# Altium PCB 官方修改版本-两层板.PcbDoc
Units mil, origin at the board's own origin, x right, y up, seen from the top; angles counter-clockwise.
Board outline 15922 x 10697 mil, 4 copper layers (Top Layer, MidLayer1, MidLayer2, Bottom Layer), stack 61.2 mil thick; 53 components, 64 nets, 140 pads, 49 vias.
Unrouted connection lines stored in the file: 5.
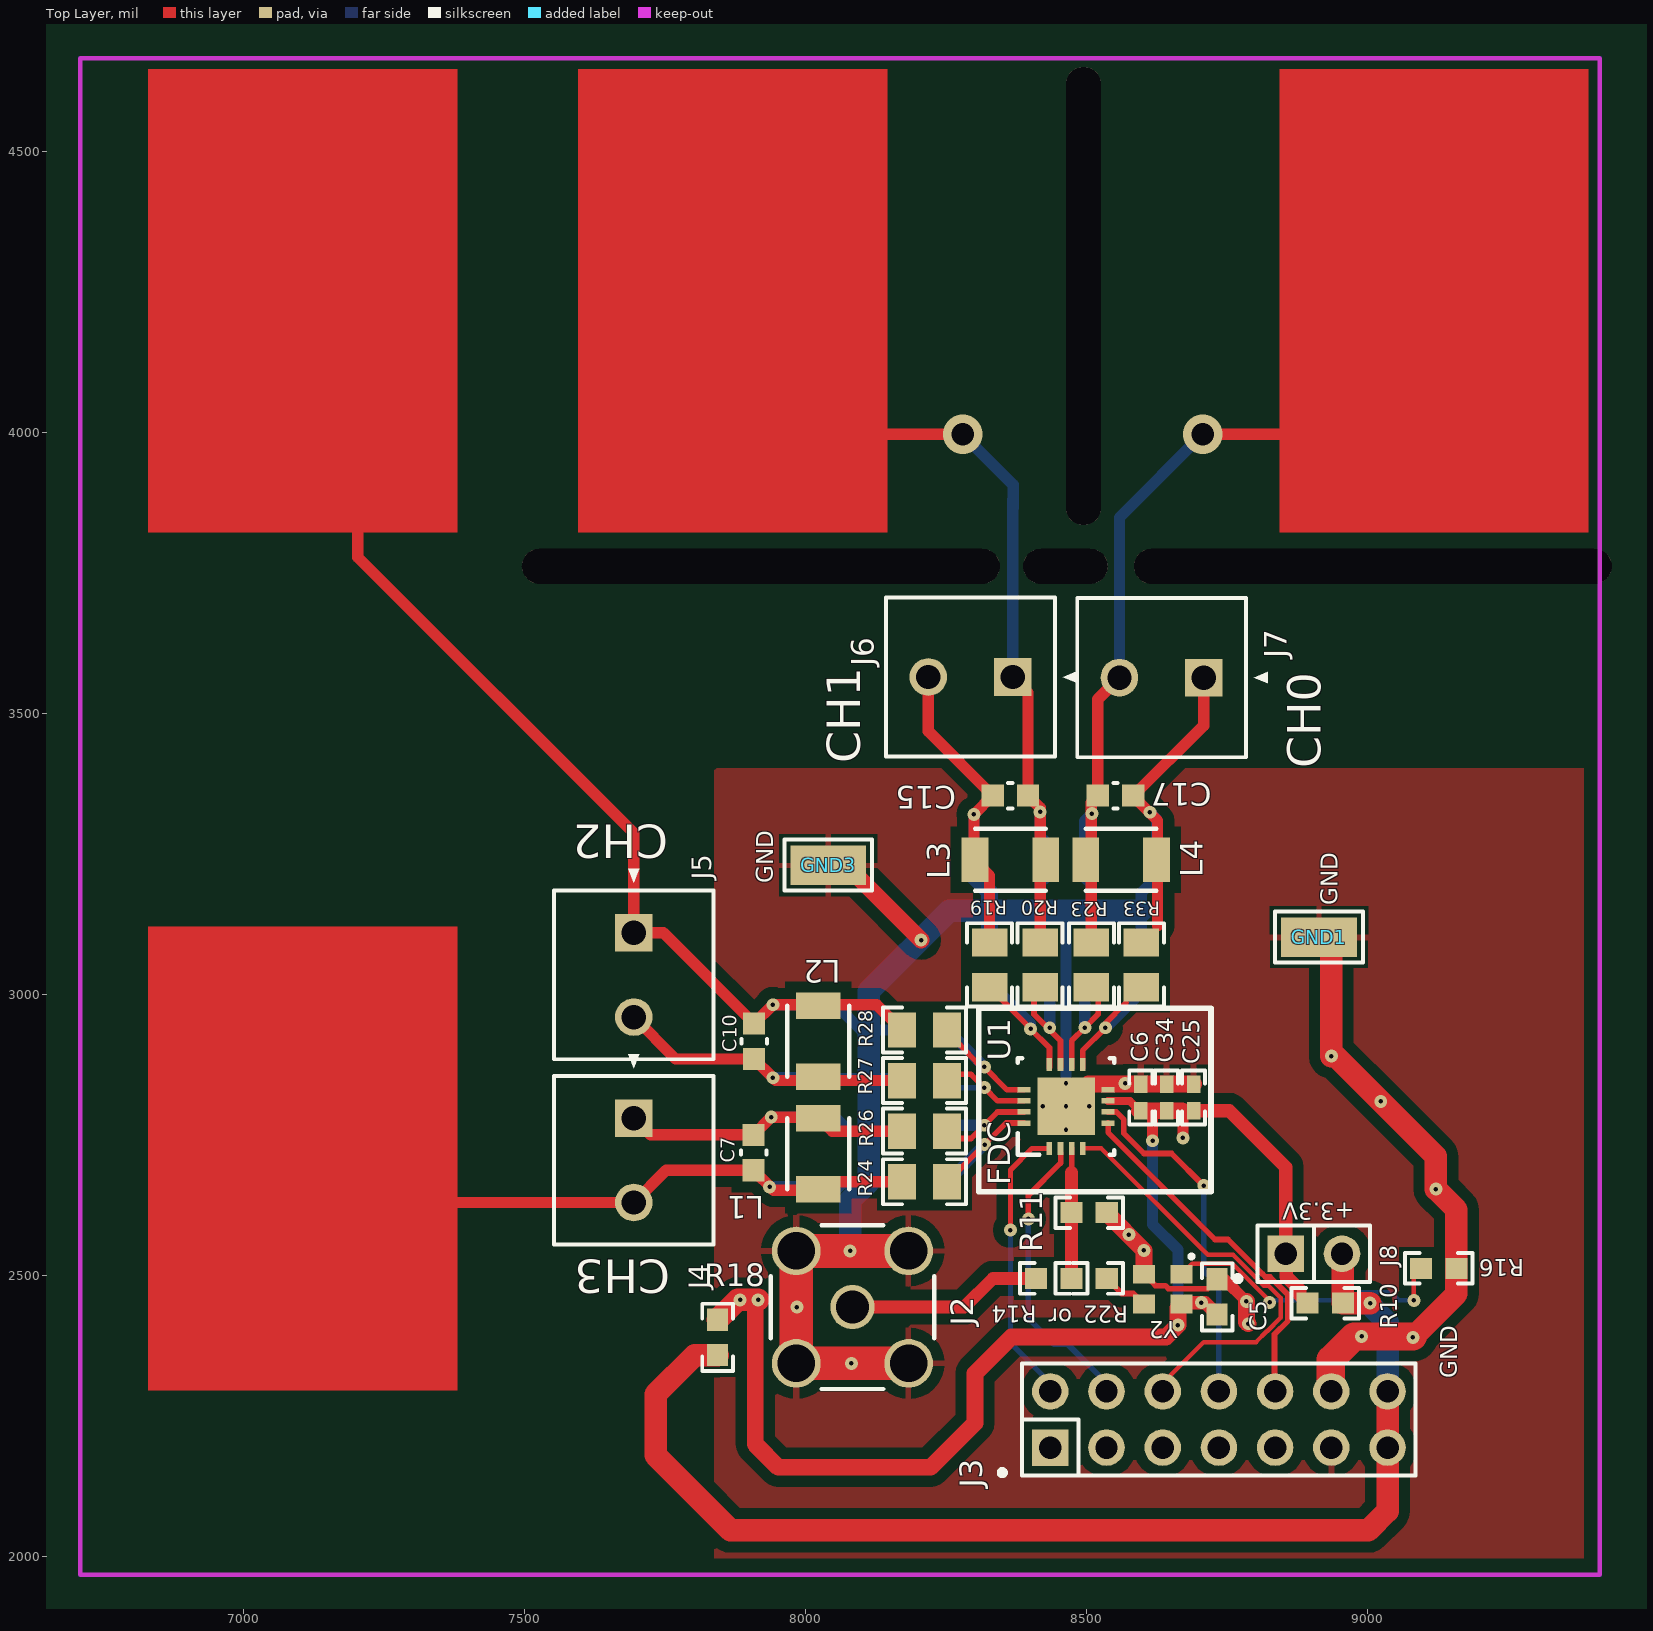
[diagram p0: Top Layer view]
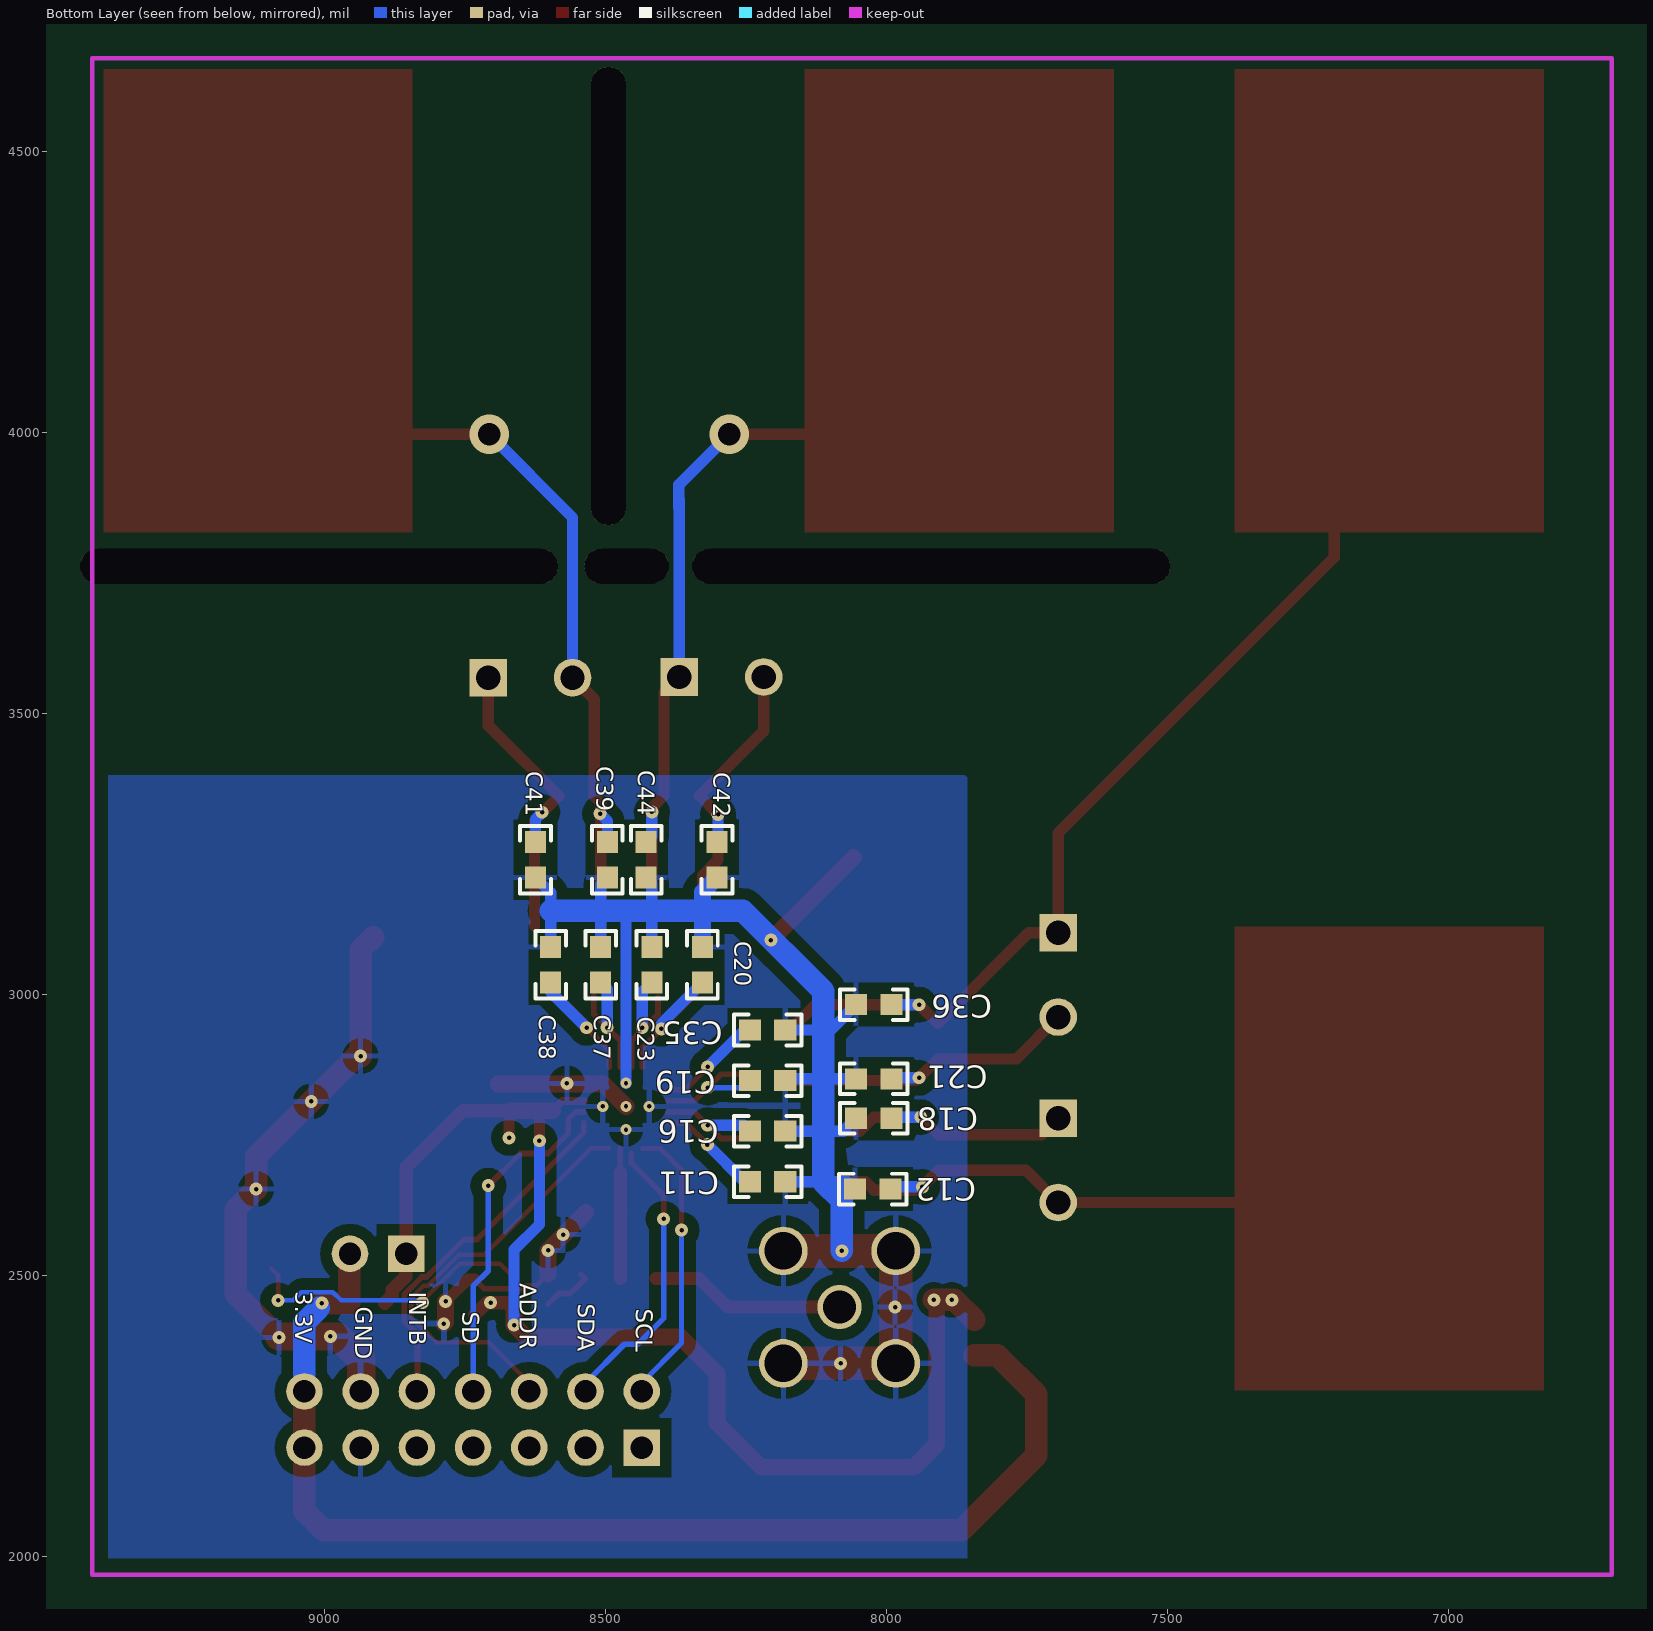
[diagram p1: Bottom Layer view, seen from below]
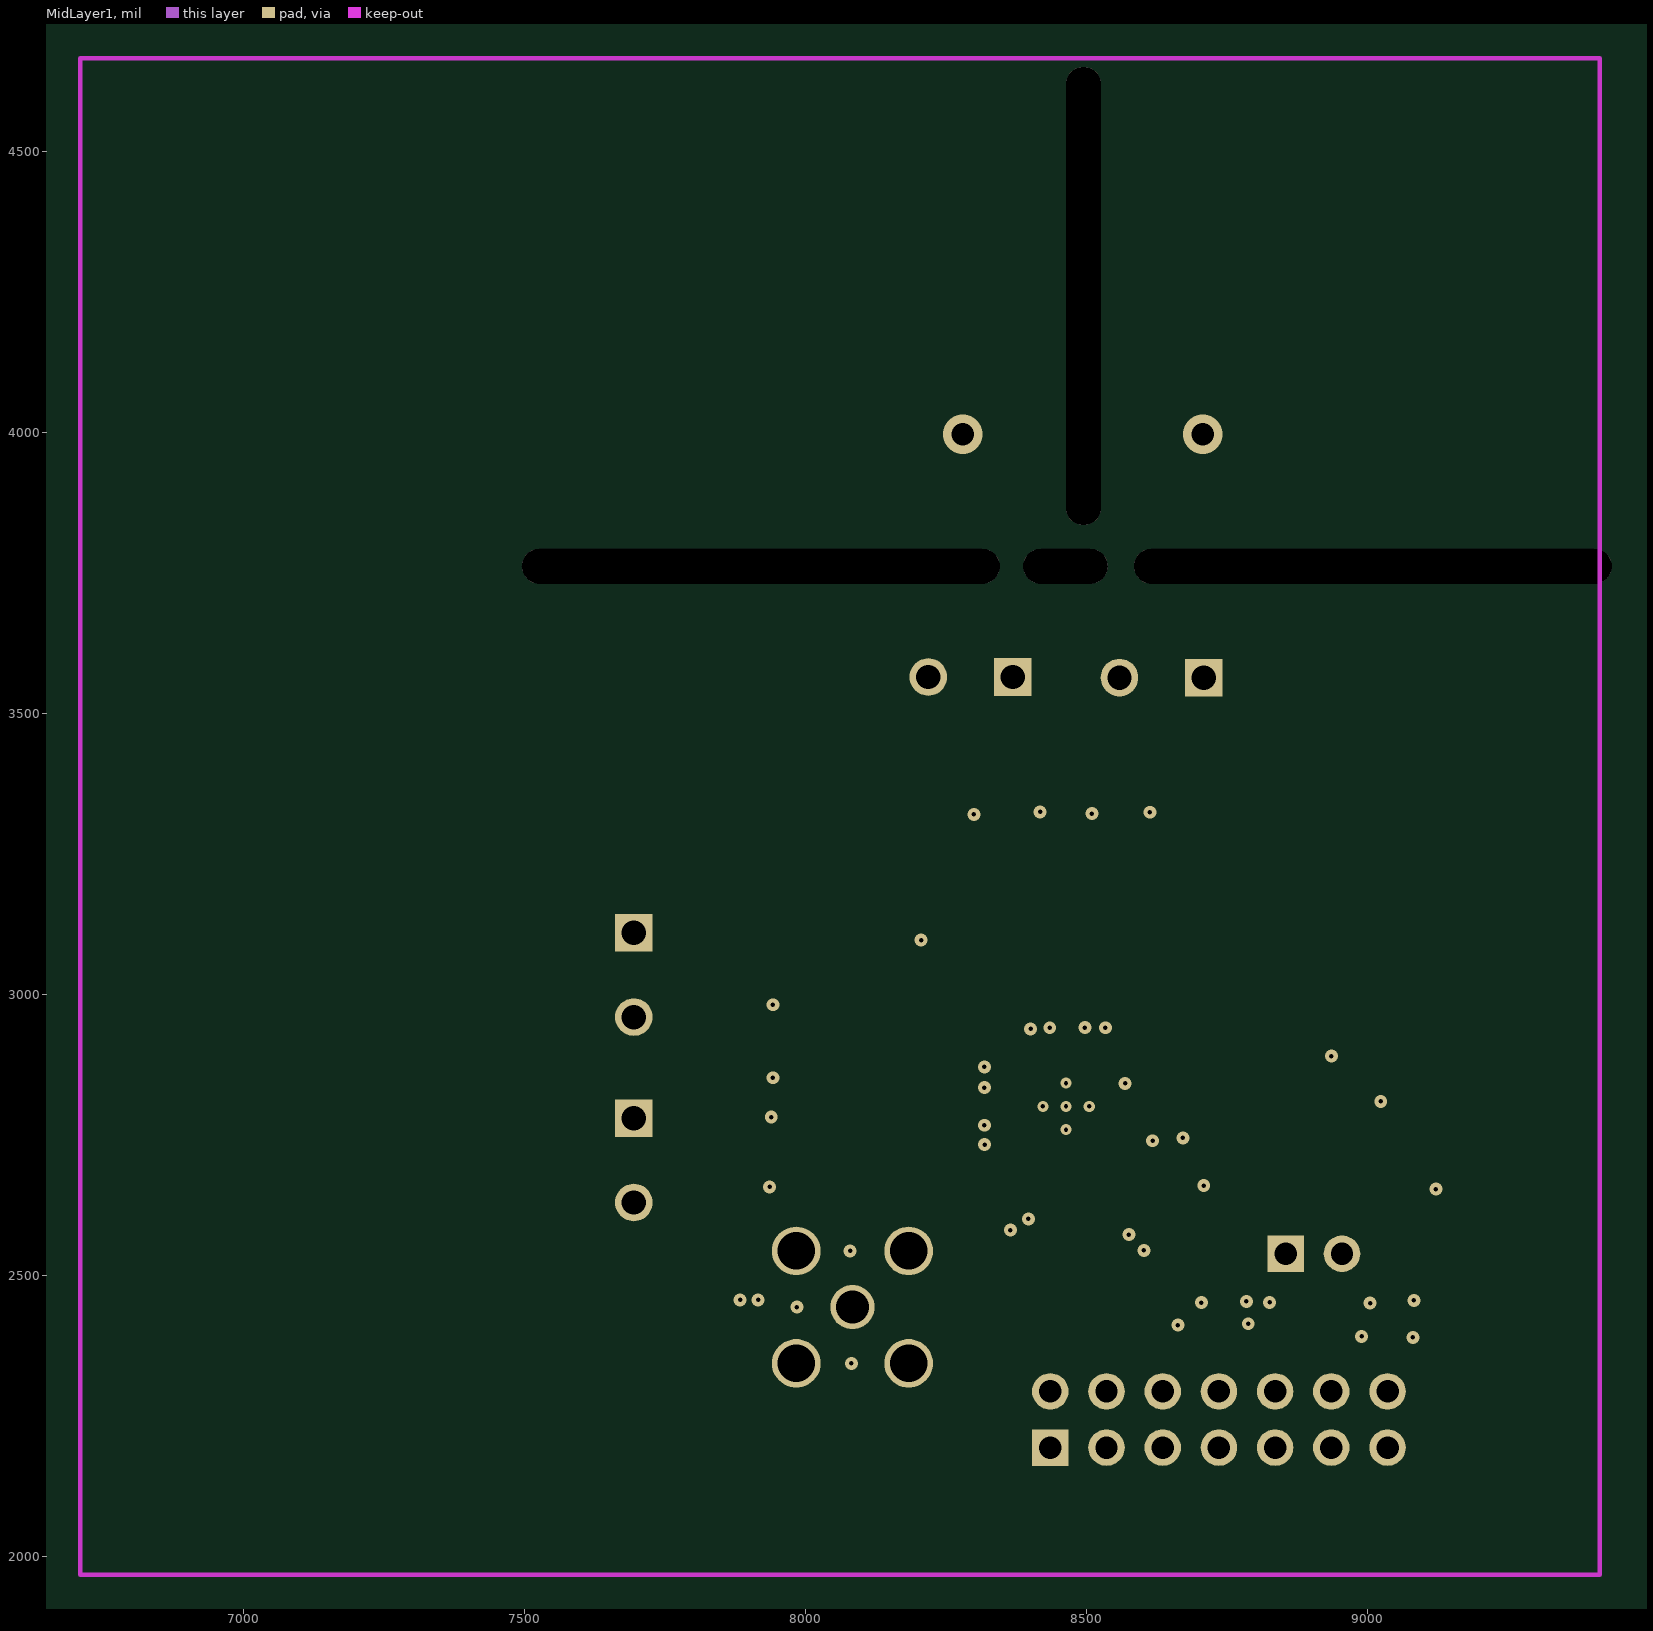
[diagram p2: MidLayer1]

## Layer stack, top to bottom
Top Layer: signal copper 1.4
Dielectric: core 12.6, FR-4, Dk 3.9
MidLayer1: signal copper 1.4
Dielectric: prepreg 30.4, FR-4, Dk 3.9
MidLayer2: signal copper 1.4
Dielectric: core 12.6, FR-4, Dk 4.8
Bottom Layer: signal copper 1.4

## Board outline
-537,9070 -444,9163 15323,9163 15323,-1084 14873,-1534 14671,-1332 -599,-1332 -599,-1394

## Design rules (kind name [scope] priority, off if disabled: settings)
AcuteAngle [All] p1: minimum=4.50000000000000E+0001 checktracksonly=FALSE
AssemblyTestPointUsage [All] p1: valid=2
Clearance Clearance_BoardEdge_MountingHoles [OnCopper and InComponentClass('Mounting Holes') vs IsKeepOut] p1: gap=40
Clearance Clearance_BoardEdge_Poly [OnCopper and InPoly vs IsKeepOut] p2: gap=25
Clearance Clearance_BoardEdge [OnCopper and Not InComponentClass('Logo') and not InComponentClass('FiducialMark') and not InRegion(1000,500,4000,800) and Not IsKeepout vs IsKeepOut] p3: gap=30
Clearance Clearance_Poly [InPolygon] p4: gap=20
Clearance [All] p5: gap=4
ComponentClearance ComponentClearance_Logo [InComponentClass('Logo')] p1: gap=50 collisioncheckmode=3 verticalgap=10 showdistances=FALSE
ComponentClearance ComponentClearance_ScrewToNut [(HasFootprint('NY PMS 440 0025 PH')) vs (HasFootprint('Keystone_1902C'))] p2: gap=5 collisioncheckmode=3 verticalgap=10 showdistances=FALSE
ComponentClearance ComponentClearance_MountingHoles [InComponentClass('Mounting Holes')] p3: gap=250 collisioncheckmode=3 verticalgap=100000 showdistances=FALSE
ComponentClearance ComponentClearance_SmallPassives [HasFootprint('0201*') or HasFootprint('0402*') or HasFootprint('0508') or HasFootprint('0603*') or HasFootprint('0612') or HasFootprint('0805*') or HasFootprint('0815*') or HasFootprint('0830*') or HasFootprint('1206*') or HasFootprint('1210*') or HasFootprint('1808*') or HasFootprint('1812*') or HasFootprint('1825*') or HasFootprint('2010*') or HasFootprint('2220*') or HasFootprint('2225*') or HasFootprint('2512*') or HasFootprint('2728*') or HasFootprint('3518*') vs HasFootprint('0201*') or HasFootprint('0402*') or HasFootprint('0508') or HasFootprint('0603*') or HasFootprint('0612') or HasFootprint('0805*') or HasFootprint('0815*') or HasFootprint('0830*') or HasFootprint('1206*') or HasFootprint('1210*') or HasFootprint('1808*') or HasFootprint('1812*') or HasFootprint('1825*') or HasFootprint('2010*') or HasFootprint('2220*') or HasFootprint('2225*') or HasFootprint('2512*') or HasFootprint('2728*') or HasFootprint('3518*')] p4: gap=20 collisioncheckmode=3 verticalgap=10 showdistances=FALSE
ComponentClearance ComponentClearance_THtoSMT [IsThruComponent vs IsSMTComponent] p5: gap=75 collisioncheckmode=3 verticalgap=30 showdistances=FALSE
ComponentClearance ComponentClearance_THtoTH [IsThruComponent vs IsThruComponent] p6: gap=78.74 collisioncheckmode=3 verticalgap=30 showdistances=TRUE
ComponentClearance [All] p7: gap=40 collisioncheckmode=3 verticalgap=10 showdistances=FALSE
DiffPairsRouting [All] p1: maxlimit=100 minlimit=10 mostfreqgap=10 maxuncoupledlength=1000
FabricationTestPointUsage TestPointUsage [All] p1: valid=2 allowmultiple=FALSE
FabricationTestpoint Testpoint [All] p1: side=3 testpointundercomponent=TRUE minsize=40 maxsize=100 preferedsize=60 minholesize=0 maxholesize=40 preferedholesize=32 testpointgrid=1 allowsidetop=TRUE allowsidebottom=TRUE usegrid=TRUE gridtolerance=0.01
FanoutControl Fanout_LCC [IsLCC] p1: bgadir=Out bgaviamode=Centered fanoutstyle=Auto fanoutdirection=Alternating viagrid=1 // Fanout_LCC (Default Rule)
FanoutControl Fanout_BGA [IsBGA] p2: bgadir=Out bgaviamode=Centered fanoutstyle=Auto fanoutdirection=Alternating viagrid=1 // Fanout_BGA (Default Rule)
FanoutControl Fanout_Default [All] p4: bgadir=Out bgaviamode=Centered fanoutstyle=Auto fanoutdirection=Alternating viagrid=1 // Fanout_Default (Default Rule)
FanoutControl Fanout_Small [(CompPinCount < 5)] p5: bgadir=Out bgaviamode=Centered fanoutstyle=Auto fanoutdirection=OutThenIn viagrid=1 // Fanout_Small (Default Rule)
HoleSize [All] p1: absolutevalues=TRUE maxlimit=251 minlimit=7.87 maxpercent=80.000 minpercent=20.000
HoleToHoleClearance [All] p1: gap=21 allowstackedmicrovias=TRUE
MinimumAnnularRing MinimumAnnularRing_ThermalPadVias [IsVia and InAnyComponent] p1: minimumring=5.91
MinimumAnnularRing [All] p2: minimumring=6
MinimumSolderMaskSliver MinimumSolderMaskSliver_Logo [InComponentClass('Logo') vs InComponentClass('Logo')] p1: minsoldermaskwidth=0.7
MinimumSolderMaskSliver [All] p2: minsoldermaskwidth=3.94
PlaneConnect [All] p1: planeconnectstyle=Relief reliefexpansion=10 reliefentries=4 reliefconductorwidth=10 reliefairgap=10
PolygonConnect [All] p1: connectstyle=Relief reliefconductorwidth=10 reliefentries=4 polygonreliefangle="90 Angle"
RoutingVias ThermalPadVias [IsVia and InAnyComponent] p1: holewidth=7.87 width=19.68 viastyle="Through Hole" minholewidth=7.87 minwidth=19.68 maxholewidth=12.99 maxwidth=23.62
RoutingVias [All] p2: holewidth=16 width=34 viastyle="Through Hole" minholewidth=7.87 minwidth=20 maxholewidth=40 maxwidth=65
SMDToCorner [All] p1: distance=30000
SilkToSilkClearance [All] p1: silktosilkclearance=5
SilkscreenOverComponentPads [IsPad] p1: minsilkscreentomaskgap=5
SolderMaskExpansion [All] p1: expansion=1.97
Width [All] p1: maxlimit=100 minlimit=4 preferedwidth=10 checkconnectedcopper=TRUE
13 further rules are at their usual default settings.

## Classes and differential pairs
component class Header: J3 J8

## Components (designator, comment, footprint, x,y, rotation, side; value= is the part's Value field where it differs from the comment)
C5 "C1608C0G1E103J" 0603 8731.98,2462.02 r90 top
C6 "C1005X7R1C103K" 0402 8595.98,2817.02 r90 top
C7 "CL10C330FB8NNNC" 0603_950 7906.98,2719.02 r90 top
C10 "CL10C330FB8NNNC" 0603_950 7907.98,2917.02 r90 top
C11 "GRM1885C2A180JA01D" 0603 8210.98,2667.02 r0 bottom
C12 "GRM1885C2A180JA01D" 0603 8023.94,2654.02 r180 bottom
C15 "CL10C330FB8NNNC" 0603_950 8363.98,3354.02 r0 top
C16 "GRM1885C2A180JA01D" 0603 8210.98,2757.02 r180 bottom
C17 "CL10C330FB8NNNC" 0603_950 8550.98,3354.02 r0 top
C18 "GRM1885C2A180JA01D" 0603 8021.98,2780.01 r0 bottom
C19 "GRM1885C2A180JA01D" 0603 8210.98,2847.02 r0 bottom
C20 "GRM1885C2A180JA01D" 0603 8326.98,3053.02 r270 bottom
C21 "GRM1885C2A180JA01D" 0603 8021.98,2850.09 r180 bottom
C23 "GRM1885C2A180JA01D" 0603 8416.98,3053.02 r90 bottom
C25 "GRM155R61A105KE15D" 0402 8689.98,2817.02 r90 top
C34 "GRM155R71C104JA88D" 0402 8641.98,2817.02 r90 top
C35 "GRM1885C2A180JA01D" 0603 8210.98,2937.02 r180 bottom
C36 "GRM1885C2A180JA01D" 0603 8021.98,2981.98 r0 bottom
C37 "GRM1885C2A180JA01D" 0603 8507.98,3053.02 r270 bottom
C38 "GRM1885C2A180JA01D" 0603 8596.98,3053.02 r90 bottom
C39 "GRM1885C2A180JA01D" 0603 8496.02,3240.02 r90 bottom
C41 "GRM1885C2A180JA01D" 0603 8623.97,3240.02 r270 bottom
C42 "GRM1885C2A180JA01D" 0603 8300.99,3240.02 r90 bottom
C44 "GRM1885C2A180JA01D" 0603 8426.97,3240.02 r270 bottom
GND1 "5015" Testpoint_Keystone_Miniature 8912.98,3102.02 r180 top
GND3 "5015" Testpoint_Keystone_Miniature 8039.98,3230.02 r180 top
J2 "901-144-8RFX" Amphenol_901-144-8RFX 8082.98,2444.02 r180 top
J3 "TSW-107-07-G-D" TSW-107-07-G-D 8734.98,2244.02 r0 top
J4 "1727010" PhoenixConact_1727010 7693.98,2705.02 r270 top
J5 "1727010" PhoenixConact_1727010 7693.98,3035.02 r270 top
J6 "1727010" PhoenixConact_1727010 8292.98,3565.02 r180 top
J7 "1727010" PhoenixConact_1727010 8632.98,3564.02 r180 top
J8 "TSW-102-07-G-S" TSW-102-07-G-S 8903.98,2539.02 r0 top
L1 "CMH322522-180KL" CMH322522 8021.98,2717.02 r270 top
L2 "CMH322522-180KL" CMH322522 8021.98,2917.02 r270 top
L3 "CMH322522-180KL" CMH322522 8363.98,3240.02 r180 top
L4 "CMH322522-180KL" CMH322522 8560.98,3240.02 r180 top
R10 "CRCW06030000Z0EA" 0603 8923.98,2451.02 r180 top
R11 "CRCW060349R9FKEA" 0603 8503.98,2612.02 r180 top
R14 "CRCW06030000Z0EA" 0603 8440.98,2495.02 r0 top
R16 "CRCW06030000Z0EA" 0603 9125.98,2513.02 r180 top
R18 "CRCW06030000Z0EA" 0603 7842.98,2390.02 r90 top
R19 "CRCW08050000Z0EA" 0805_HV 8326.98,3053.02 r90 top
R20 "CRCW08050000Z0EA" 0805_HV 8416.98,3053.02 r90 top
R22 "CRCW06030000Z0EA" 0603 8503.98,2495.02 r180 top
R23 "CRCW08050000Z0EA" 0805_HV 8507.98,3053.02 r90 top
R24 "CRCW08050000Z0EA" 0805_HV 8210.98,2667.02 r180 top
R26 "CRCW08050000Z0EA" 0805_HV 8210.98,2757.02 r180 top
R27 "CRCW08050000Z0EA" 0805_HV 8210.98,2847.02 r180 top
R28 "CRCW08050000Z0EA" 0805_HV 8210.98,2937.02 r180 top
R33 "CRCW08050000Z0EA" 0805_HV 8596.98,3053.02 r90 top
U1 "FDC2114RGHR" RGH0016A 8462.98,2801.02 r90 top
Y2 "625L3C040M00000" OSC_CTS_625 8634.98,2476.02 r270 top

## Footprints (in the part's own frame and the unit in brackets; to place one, negate y for a bottom-side part, rotate by r counter-clockwise, add the part's x,y. Pads: shape width x height; smd on the part's side, far side on the other; paste and mask are expansions set on the pad)
0402 [mm] "0402 from SM-752 data"
  rect 0.8x0.6 smd: 1(-0.6,0) 2(0.6,0)
  silkscreen extent -1.22,-0.52 1.22,0.52, body extent -0.55,-0.3 0.55,0.3, height 0.6
0603 [mm] "0603 from SM-752 data"
  rect 1x0.95 smd: 1(-0.8,0) 2(0.8,0)
  silkscreen extent -1.52,-0.69 1.52,0.69, body extent -0.87,-0.47 0.87,0.47, height 0.85
0603_950 [mm] "0603_950"
  rect 1x1 smd: 1(-0.8,0) 2(0.8,0)
  silkscreen extent -0.1,-0.58 0.1,0.58, body extent -0.87,-0.48 0.87,0.48, height 0.95
0805_HV [mil] "0805 with 30mil clearance between pads"
  rect 50x63 smd: 1(-40,0) 2(40,0)
  silkscreen extent -74,-40 74,40, body extent -43,-29 43,29, height 43
Amphenol_901-144-8RFX [mm] "SMA Straight Jack, TH"
  round 2 hole 1.5: 1(0,0)
  round 2.2 hole 1.7: 2(-2.54,2.54) 3(-2.54,-2.54) 4(2.54,-2.54) 5(2.54,2.54)
  silkscreen extent -3.7,-3.7 3.7,3.7, body extent -3.7,-3.7 3.7,3.7, height 9.93
CMH322522 [mm] "Bourns"
  rect 1.2x2 smd: 1(-1.6,0) 2(1.6,0)
  silkscreen extent -1.6,-1.4 1.6,1.4, body extent -1.7,-1.35 1.7,1.35, height 2.4
OSC_CTS_625 [mm] "CTS"
  rect 0.85x1 smd: 1(-0.675,0.85) 2(-0.675,-0.85) 3(0.675,-0.85) 4(0.675,0.85)
  silkscreen extent -1.52,1.25 -1.43,1.35, body extent -1.1,-1.35 1.1,1.35, height 1.02
PhoenixConact_1727010 [mm]
  rect 1.7x1.7 hole 1.1: 1(-1.905,0)
  round 1.7 hole 1.1: 2(1.905,0)
  silkscreen extent -4.8,-3.6 3.81,3.6, body extent -3.81,-3.6 3.81,3.7, height 8.52
RGH0016A [mm] "QFN, 16-Leads, Body 4x4mm, Pitch 0.5mm, TI Recommended"
  rect 0.6x0.25 smd: 1(-1.9,0.75) 2(-1.9,0.25) 3(-1.9,-0.25) 4(-1.9,-0.75) 9(1.9,-0.75) 10(1.9,-0.25) 11(1.9,0.25) 12(1.9,0.75)
  rect 0.25x0.6 smd: 5(-0.75,-1.9) 6(-0.25,-1.9) 7(0.25,-1.9) 8(0.75,-1.9) 13(0.75,1.9) 14(0.25,1.9) 15(-0.25,1.9) 16(-0.75,1.9)
  rect 2.6x2.6 smd paste-1.3: 17(0,0)
  silkscreen extent -2.17,-2.17 2.17,2.17, body extent -2.05,-2.05 2.05,2.05, height 0.81
Testpoint_Keystone_Miniature [mil] "Miniature SMT test point"
  rect 135x70 smd: 1(0,0)
  silkscreen extent -78,-46 78,45, body extent -52,-20 52,20, height 61
TSW-102-07-G-S [mm] "Samtec 100mil, 1x2, 230 mil above insulator"
  rect 1.65x1.65 hole 1.016 mask+0: 1(-1.27,0)
  round 1.65 hole 1.016 mask+0: 2(1.27,0)
  silkscreen extent -3.56,-1.27 2.54,1.27, body extent -2.54,-1.27 2.54,1.27, height 8.38
TSW-107-07-G-D [mm] "Samtec 100mil, 2x7, 230 mil above insulator"
  rect 1.65x1.65 hole 1.016 mask+0: 1(-7.62,-1.27)
  round 1.65 hole 1.016 mask+0: 2(-7.62,1.27) 3(-5.08,-1.27) 4(-5.08,1.27) 5(-2.54,-1.27) 6(-2.54,1.27) 7(0,-1.27) 8(0,1.27) 9(2.54,-1.27) 10(2.54,1.27) 11(5.08,-1.27) 12(5.08,1.27) 13(7.62,-1.27) 14(7.62,1.27)
  silkscreen extent -9.91,-2.54 8.89,2.54, body extent -8.89,-2.54 8.89,2.54, height 8.38

## Part data
C5: "CAP, CERM, 0.01uF, 25V, +/-5%, C0G/NP0, 0603"
C6: "CAP, CERM, 0.01 礔, 16 V, +/- 10%, X7R, 0402"
C7 C10 C15 C17: "CAP, CERM, 33 pF, 50 V, +/- 1%, C0G/NP0, 0603_950"
C11 C12 C16 C18 C19 C20 C21 C23 C35 C36 C37 C38 C39 C41 C42 C44: "CAP, CERM, 18pF, 100V, +/-5%, C0G/NP0, 0603"
C25: "CAP, CERM, 1uF, 10V, +/-10%, X5R, 0402"
C34: library part 0402YC132KAT2A, "CAP CER 0.1UF 16V 5% X7R 0402"
GND1 GND3: "Test Point, Miniature, SMT"
J2: "SMA Straight Jack, Gold, 50 Ohm, TH"
J3: "Header, 100mil, 7x2, Gold, TH"
J4 J5 J6 J7: "Conn Term Block, 2POS, 3.81mm, TH"
J8: "Header, TH, 100mil, 2x1, Gold plated, 230 mil above insulator"
L1 L2 L3 L4: "Inductor, Shielded, Ferrite, 18 礖, 0.12 A, 3.3 ohm, SMD"
R10 R14 R16 R18 R22: "RES, 0 ohm, 5%, 0.1W, 0603"
R11: "RES, 49.9, 1%, 0.1 W, 0603"
R19 R20 R23 R24 R26 R27 R28 R33: "RES, 0 ohm, 5%, 0.125W, 0805"
U1: "Multi-Channel 12/26-Bit Capacitance to Digital Converter (FDC) for Capacitive Sensing, RGH0016A"
Y2: "OSC, 40 MHz, 3.3 V, SMD"

## Free pads (board coordinates)
  oval 850x62 hole 62 slot 850 at 0 deg unplated: 0(7919.98,3762.02) 0(9008.98,3762.02)
  oval 150x62 hole 62 slot 150 at 0 deg unplated: 0(8461.98,3762.02)
  oval 62x815 hole 62 slot 815 at 90 deg unplated: 0(8493.98,4243.02)

## Via types
v1: diameter 23, hole 8, Top Layer to Bottom Layer, tented both sides, 42 vias
v2: diameter 19.68, hole 7.87, Top Layer to Bottom Layer, 5 vias
v3: diameter 70, hole 40, Top Layer to Bottom Layer, 2 vias

## Nets (pads, with @x,y where several pads share a name; then routed paths per layer and width w, separated by ;. In a path a pad name is that pad's centre, name@x,y a point inside that pad or via, vN(x,y) a via of type N, cw(c..) or ccw(c..) an arc to the next point about the centre after c; other vN are vias at no path point)
+3.3V: J3.13 J3.14 J8.2 R10.1 R18.1 | length 2128.1
  Top Layer w40: R18.1 7802.52,2358.52 7733,2289 7733,2180 7866,2047 9001,2047 9034.98,2080.98 J3.13 J3.14 ; J8.2 8955.48,2537.52 R10.1 v1(9003.98,2451.02)
  Bottom Layer w40: v1@9009.48,2442.52 9034.98,2417.02 J3.14
+5V: 
ADDR: J3.5 J3.6 U1.4 | length 755.5
  Top Layer w8: U1.4 8525.79,2726.22 8715.1,2536.91 8760.09,2536.91 8799.5,2497.5 8799.5,2497.43 8812.39,2484.54 8812.46,2484.54 8814.9,2482.1 8823.06,2482.1 8844.66,2460.5 8844.66,2424.88 8820.8,2401.02 8820.17,2401.02 8800.98,2381.83 8707.79,2381.83 J3.6@8634.98,2309.02
CLKIN: R11.2 R14.2 R22.2 U1.3 | length 235.5
  Top Layer w10: 8472.82,2683.18 U1.3
  Top Layer w23: R14.2 R11.2@8472.48,2611.02 ; 8472.82,2683.18 R11.2@8472.82,2613.36 ; R11.2@8471.48,2612.02 R11.2@8472.82,2613.36 ; R11.2@8471.48,2612.02 R11.2@8472.48,2611.02 ; R11.2@8471.48,2612.02 R11.2@8472.48,2611.02 ; R11.2@8471.48,2612.02 R11.2@8472.82,2613.36
GND: C5.2 C6.2 C11.1 C12.1 C16.2 C18.2 C19.1 C20.1 C21.1 C23.2 C25.2 C34.2 C35.2 C36.2 C37.1 C38.2 C39.1 C41.2 C42.1 C44.2 GND1.1 GND3.1 J2.2 J2.3 J2.4 J2.5 J3.11 J3.12 R11.1 R16.1 U1.8 U1.17 Y2.2 | length 5275.2
  Top Layer w10: Y2.2 8621.98,2482.13 8639.76,2482.13 8645.03,2476.86 8715.33,2476.86 C5.2
  Top Layer w20: C5.2 8744.48,2493.52 v1(8783.98,2454.02)
  Top Layer w30: GND3.1@8057.98,3244.02 v1(8204.98,3097.02) ; v2(8462.98,2801.02) U1.17@8502.6,2840.64 ; R11.1@8534.48,2612.02 v1(8601.52,2544.98) Y2.2 ; C6.2 U1.17@8502.6,2840.64 ; C25.2 C34.2 U1.17@8502.6,2840.64 ; v1(8783.98,2454.02) 8783.98,2417.55 v1(8787.2,2414.33)
  Top Layer w40: GND1.1 8934.98,3080.02 v1(8934.98,2890.52) 8942.48,2890.52 v1(9022.98,2810.02) 9120.98,2712.02 v1(9120.98,2654.02) 9157.48,2617.52 R16.1 9157.48,2467.52 v1(9079.98,2390.02)
  Top Layer w50: J3.12 8933.98,2295.02 8933.98,2351.02 8974.98,2392.02 v1(8988.98,2392.02) v1@9079.98,2392.02
  Top Layer w60: J2.2 J2.5 J2.4 J2.3
  MidLayer1 w8: J3.12 J3.12@8934.98,2304.02
  Bottom Layer w20: C18.2 8076.47,2757.02 8109.98,2757.02 ; C21.1 8109.98,2850.09 ; C36.2 8098.44,2937.02 8109.98,2937.02 ; C12.1 8068.44,2667.02 8109.98,2667.02 8111.98,2667.02 C11.1 ; 8111.98,2757.02 C16.2 ; 8111.98,2850.09 8176.41,2850.09 C19.1 ; 8111.98,2937.02 C35.2 ; C23.2 8416.98,3149.02 8416.98,3198.53 C44.2 ; 8459.98,3149.02 8462.98,3146.02 v2(8462.98,2842.36) ; C39.1 8507.98,3196.56 8507.98,3149.02 C37.1 ; C38.2 8596.98,3149.02 8596.98,3181.53 C41.2
  Bottom Layer w30: 8109.98,2667.02 8109.98,2757.02 8109.98,2850.09 8109.98,2937.02 ; C42.1 8326.98,3182.53 8326.98,3149.02 C20.1
  Bottom Layer w40: v1(8078.98,2544.02) 8078.98,2634.02 8111.98,2667.02 8111.98,2757.02 8111.98,2850.09 8111.98,2937.02 8111.98,3006.02 8254.98,3149.02 8326.98,3149.02 8416.98,3149.02 8459.98,3149.02 8507.98,3149.02 8596.98,3149.02
  other v1: 8080.98,2344.02 7983.98,2444.02 8574.98,2573.02 8567.98,2842.02
  other v2: 8462.98,2759.68 8421.64,2801.02 8504.32,2801.02
IN0A: C38.1 R33.1 U1.9 | length 262.1
  Top Layer w10: U1.9@8492.51,2870.82 8492.51,2900.55 v1(8532.98,2941.02) 8532.98,2949.02 8569.86,2985.9 ; R33.1@8596.98,3005.02 R33.1
  Bottom Layer w20: v1(8532.98,2941.02) 8596.98,3005.02 C38.1
IN0B: C37.2 R23.1 U1.10 | length 230.6
  Top Layer w10: U1.10@8472.82,2870.82 8472.82,2917.86 v1(8496.4,2941.44) 8519.98,2965.02 R23.1@8519.98,2997.02
  Bottom Layer w20: v1(8496.4,2941.44) 8496.4,3009.94 C37.2
IN1A: C23.1 R20.1 U1.11 | length 298
  Top Layer w10: R20.1@8405.98,2995.02 8405.98,2965.02 ; U1.11@8453.14,2870.82 8453.14,2917.86 ; 8405.98,2965.02 8453.14,2917.86 ; 8405.98,2965.02 8453.14,2917.86
  Bottom Layer w20: C23.1 8433.98,3004.52 v1(8433.98,2941.02)
IN1B: C20.2 R19.1 U1.12 | length 299
  Top Layer w10: R19.1 8399.98,2940.02 v1(8399.98,2939.02) 8433.45,2905.55 8433.45,2890.63 U1.12@8433.45,2870.82
  Bottom Layer w20: C20.2 8399.98,2948.52 v1(8399.98,2939.02)
IN2A: C35.1 R28.1 U1.13 | length 284.4
  Top Layer w10: R28.1@8254.27,2937.02 8254.26,2936.94 8254.14,2931.96 8311.85,2871.21 v1(8317.56,2871.21) 8358.22,2830.55 U1.13
  Bottom Layer w20: C35.1 8251.75,2937.02 v1(8317.56,2871.21)
IN2B: C19.2 R27.1 U1.14 | length 223
  Top Layer w10: R27.1@8261.98,2858.02 8293.98,2858.02 v1(8317.56,2834.44) 8341.14,2810.86 U1.14
  Bottom Layer w10: C19.2@8243.48,2842.02 8251.05,2834.44 v1(8317.56,2834.44)
IN3A: C16.1 R26.1 U1.15 | length 228.4
  Top Layer w10: R26.1@8263.98,2744.02 8293.98,2744.02 8341.14,2791.18 U1.15
  Bottom Layer w10: C16.1@8247.9,2767.6 C16.1@8253.06,2767.6
  Bottom Layer w20: C16.1 8253.06,2767.6 v1(8317.56,2767.6)
IN3B: C11.2 R24.1 U1.16 | length 283.3
  Top Layer w10: R24.1 8251.98,2667.02 v1(8317.98,2733.02) 8356.45,2771.49 U1.16
  Bottom Layer w20: C11.2 8251.98,2667.02 v1(8317.98,2733.02)
INTB: J3.9 J3.10 U1.5 | length 625.5
  Top Layer w10: U1.5 8537.78,2754.6 8728.1,2564.28 8751.1,2564.28 8812.5,2502.89 8812.5,2502.81 8817.77,2497.54 8826,2497.54 8857.66,2465.89 8857.66,2419.49 8833.8,2395.64 J3.10@8833.8,2309.02 ; J3.10@8833.8,2309.02 8834.98,2309.02 J3.10@8833.8,2309.02
JTAG_RST: 
JTAG_TCK: 
JTAG_TDI: 
JTAG_TDO: 
JTAG_TEST: 
JTAG_TMS: 
MSP_DM: 
MSP_DP: 
MSP_PUR: 
MSPACLK: 
NetC4_1: 
NetC7_1: C7.1 C12.2 J4.2 L1.2 R24.2 | length 926.7
  Top Layer w20: 7348,2631 7348.98,2630.02 J4.2 7751.48,2687.52 C7.1 7942.44,2652.06 8021.98,2652.06 8036.94,2667.02 R24.2
  Bottom Layer w20: v1(7935.52,2658) 7988.47,2658 C12.2
NetC7_2: C7.2 C18.1 J4.1 L1.1 R26.2 | length 565.4
  Top Layer w20: J4.1 7723.48,2750.52 C7.2 v1(7938.44,2781.98) 8021.98,2781.98 8046.94,2757.02 R26.2
  Bottom Layer w20: v1(7938.44,2781.98) 7988.52,2781.98 C18.1
NetC10_1: C10.1 C21.2 J5.2 L2.2 R27.2 | length 798.1
  Top Layer w20: J5.2 7768.48,2885.52 C10.1 v1(7941.48,2852.02) v1@7946.48,2847.02 ; v1@7946.48,2847.02 R27.2 v1@7946.48,2847.02
  Bottom Layer w20: v1(7941.48,2852.02) 7988.55,2852.02 C21.2
NetC10_2: C10.2 C36.1 J5.1 L2.1 R28.2 | length 1600.8
  Top Layer w20: 7203,3882 7203,3778 7693.98,3287.02 J5.1 7746.48,3110.02 C10.2 v1(7941.44,2981.98) 8126.02,2981.98 R28.2
  Bottom Layer w20: v1(7941.44,2981.98) C36.1
NetC13_2: 
NetC14_2: 
NetC15_1: C15.1 C42.2 J6.2 L3.2 R19.2 | length 594.7
  Top Layer w20: J6.2 8217.98,3468.52 C15.1 v1(8299.02,3320.56) 8299.02,3240.02 8326.98,3212.06 R19.2
  Bottom Layer w20: v1(8299.02,3320.56) 8299.02,3273.48 C42.2
NetC15_2: C15.2 C44.1 J6.1 L3.1 R20.2 | length 1448.2
  Top Layer w20: 7864.98,3997.02 v3(8278.98,3997.02) ; J6.1 8395.48,3537.52 C15.2 8416.98,3332.52 v1(8416.98,3325.02) 8416.98,3240.02 R20.2
  Bottom Layer w20: v3(8278.98,3997.02) 8369,3907 8369,3866 ; J6.1 8367.98,3881.02 ; v1(8416.98,3325.02) 8416.98,3281.51 C44.1
NetC17_1: C17.1 C39.2 J7.2 L4.2 R23.2 | length 1363.9
  Top Layer w20: R23.2 8507.98,3341.52 8519.48,3353.02 8519.48,3525.52 J7.2 ; v3(8705.98,3997.02) 9027.98,3997.02
  Bottom Layer w20: C39.2 8496.02,3309.06 v1(8508.98,3322.02) ; J7.2 8557.98,3849.02 v3(8705.98,3997.02)
NetC17_2: C17.2 C41.1 J7.1 L4.1 R33.2 | length 808.9
  Top Layer w20: 8625.94,3121.98 8625.94,3240.02 8625.94,3309.56 ; J7.1 8707.98,3478.52 ; C17.2@8582.48,3353.02 8707.98,3478.52 ; C17.2@8582.48,3353.02 8625.94,3309.56 ; C17.2@8582.48,3353.02 8625.94,3309.56 ; C17.2@8582.48,3353.02 8707.98,3478.52
  Bottom Layer w20: v1(8612,3324.48) 8623.97,3312.51 C41.1
NetC26_1: 
NetC28_1: 
NetD2_1: 
NetD3_1: 
NetJ1_2: 
NetJ1_3: 
NetJ1_6: 
NetJ2_1: J2.1 R14.1 | length 347.6
  Top Layer w23: J2.1 8281.98,2444.02 8332.98,2495.02 R14.1
NetR1_1: 
NetR2_1: 
NetR3_1: 
NetR4_1: 
NetR5_1: 
NetR16_2: R16.2 Y2.1 | length 527
  Top Layer w8: Y2.1 8687.3,2521.45 8758.43,2521.45 8825.16,2454.73 v1(8825.16,2452.42) ; v1(9081.98,2456.02) 9081.98,2500.52 R16.2
  Bottom Layer w8: v1(8825.16,2452.42) 8828.75,2456.02 8969.98,2456.02 8984.48,2470.52 9040.48,2470.52 9054.98,2456.02 v1(9081.98,2456.02)
NetR17_1: 
NetR21_1: 
NetR22_1: R22.1 Y2.3 | length 95.5
  Top Layer w10: R22.1@8542.94,2502.48 R22.1 8562.2,2468.3 8582.66,2468.3 Y2.3
NetR25_1: 
P3.0: 
P3.1: 
P3.2: 
P3.3: 
P3.4: 
SCL: J3.1 J3.2 U1.1 | length 493.7
  Top Layer w9: v1(8363.98,2581.02) 8363.98,2665.41 8363.98,2688.02 8402.18,2726.22 8424.78,2726.22 U1.1
  Bottom Layer w9: v1(8363.98,2581.02) 8363.98,2380.02 J3.2@8434.98,2309.02
SD: J3.7 J3.8 U1.6 | length 601.2
  Top Layer w10: U1.6 8552.59,2791.18 8565.98,2777.79 8565.98,2753.02 8601.78,2717.22 8650.78,2717.22 v1(8707.98,2660.02)
  Bottom Layer w10: v1(8707.98,2660.02) 8707.98,2508.25 8734.98,2481.25 J3.8@8734.98,2309.02
SDA: J3.3 J3.4 U1.2 | length 503.6
  Top Layer w10: v1(8395.98,2601.02) 8395.98,2643.02 8453.45,2700.49 U1.2@8453.45,2717.22
  Bottom Layer w10: v1(8395.98,2601.02) 8395.98,2424.02 8441.98,2378.02 8465.98,2378.02 J3.4@8534.98,2309.02
VBUS: 
VDD: C5.1 C6.1 C25.1 C34.1 J8.1 R10.2 R18.2 U1.7 Y2.4 | length 2458.2
  Top Layer w14: U1.7 8576.52,2810.86 C6.1@8593.98,2793.4
  Top Layer w20: 8614.48,2793.4 8616.98,2790.9 v1(8616.98,2740.02) ; 8669.48,2793.4 8670.98,2791.9 v1(8670.98,2745.02)
  Top Layer w24: Y2.4 8671.02,2452.02 v1(8703.98,2452.02) 8710.48,2452.02 C5.1 ; 8669.48,2793.4 C25.1 8753.6,2793.4 8853.98,2693.02 J8.1 8854.8,2539.02 8854.8,2498.44 8878.66,2474.58 8878.66,2464.85 R10.2
  Top Layer w30: v1(7914.98,2457.02) 7910,2452.04 7910,2200 7951,2159 8222,2159 8301,2238 8301,2326 8366,2391 8640.96,2391 v1(8661.98,2412.02) 8661.98,2442.98 Y2.4 ; C6.1@8593.98,2793.4 C6.1 8614.48,2793.4 C34.1 8669.48,2793.4
  Top Layer w40: R18.2 7878.48,2457.02 v1(7883.21,2457.02) v1(7914.98,2457.02)
  Bottom Layer w20: v1(8616.98,2740.02) 8616.98,2591.02 8661.98,2546.02 v1(8661.98,2412.02)
VUSB: 

## Polygon pours and split planes (outlines as drawn)
GND on Bottom Layer "Bottom Solder-No Net" (solid, remove dead copper, pour order 11): 7856,3386.67 7860.28,3390.58 9589,3390.58 9589,2026.82 9518.82,1962.7 9466.62,1915 7856,1915
GND on Top Layer "Bottom Solder-No Net" (solid, remove dead copper, pour order 11): 7837,3399 7841.28,3402.91 9570,3402.91 9570,2039.15 9499.82,1975.03 9447.62,1927.33 7837,1927.33

## Keep-outs
Keep-Out Layer:
  lines w8: 9412.98,4666.02 9412.98,1968 6709,1968 6709,4666.02 9412.98,4666.04

## Other copper
Top Layer:
  region net NetC7_1: 7379.98,2296.02 7379.98,3121.02 6829.98,3121.02 6829.98,2296.02
  region net NetC10_2: 7379.98,3822.02 7379.98,4647.02 6829.98,4647.02 6829.98,3822.02
  region net NetC15_2: 8144.98,3822.02 8144.98,4647.02 7594.98,4647.02 7594.98,3822.02
  region net NetC17_1: 9392.98,3822.02 9392.98,4647.02 8842.98,4647.02 8842.98,3822.02

## Silkscreen, mask and mechanical layers (free items; w line width, h text height)
Top Overlay:
  lines w10: 8307.98,2649.02 8720.98,2649.02 8720.98,2976.02 8307.98,2976.02 8307.98,2649.02
  text "CH1" at 8096.98,3412.02 h60 r90
  text "CH0" at 8915.98,3403.02 h60 r90
  text "CH2" at 7754.98,3302.02 h60 r180
  text "GND" at 7941.98,3198.02 h30 r90
  text "GND" at 8945.98,3159.02 h30 r90
  text "FDC" at 8363.98,2661.02 h40 r90
  text "+3.3V" at 8975.98,2630.02 h30 r180
  text "CH3" at 7758.98,2528.02 h60 r180
  text "or" at 8473.98,2441.02 h30 r180
  text "GND" at 9158.98,2317.02 h30 r90
Bottom Overlay:
  text "ADDR" at 8651.98,2486.32 h30 r90
  text "3.3V" at 9050.98,2472.02 h30 r90
  text "INTB" at 8848.98,2471.02 h30 r90
  text "SDA" at 8548.98,2450.39 h30 r90
  text "GND" at 8944.37,2444.27 h30 r90
  text "SCL" at 8445.98,2441.02 h30 r90
  text "SD" at 8753.98,2436.02 h30 r90
M1 Board Outline:
  lines w8: 9413.98,4661.02 9413.98,1967 6710,1967 6710,4661.02 9413.98,4661.04